# Altium PCB SuperCap-NEW-V2.0.PcbDoc (part 1 of 2)
Units mm, origin at the board's own origin, x right, y up, seen from the top; angles counter-clockwise.
Board outline 100.01 x 70.01 mm, 4 copper layers (Top Layer, POWER, GND, Bottom Layer), stack 0.603 mm thick; 124 components, 69 nets, 395 pads, 430 vias.
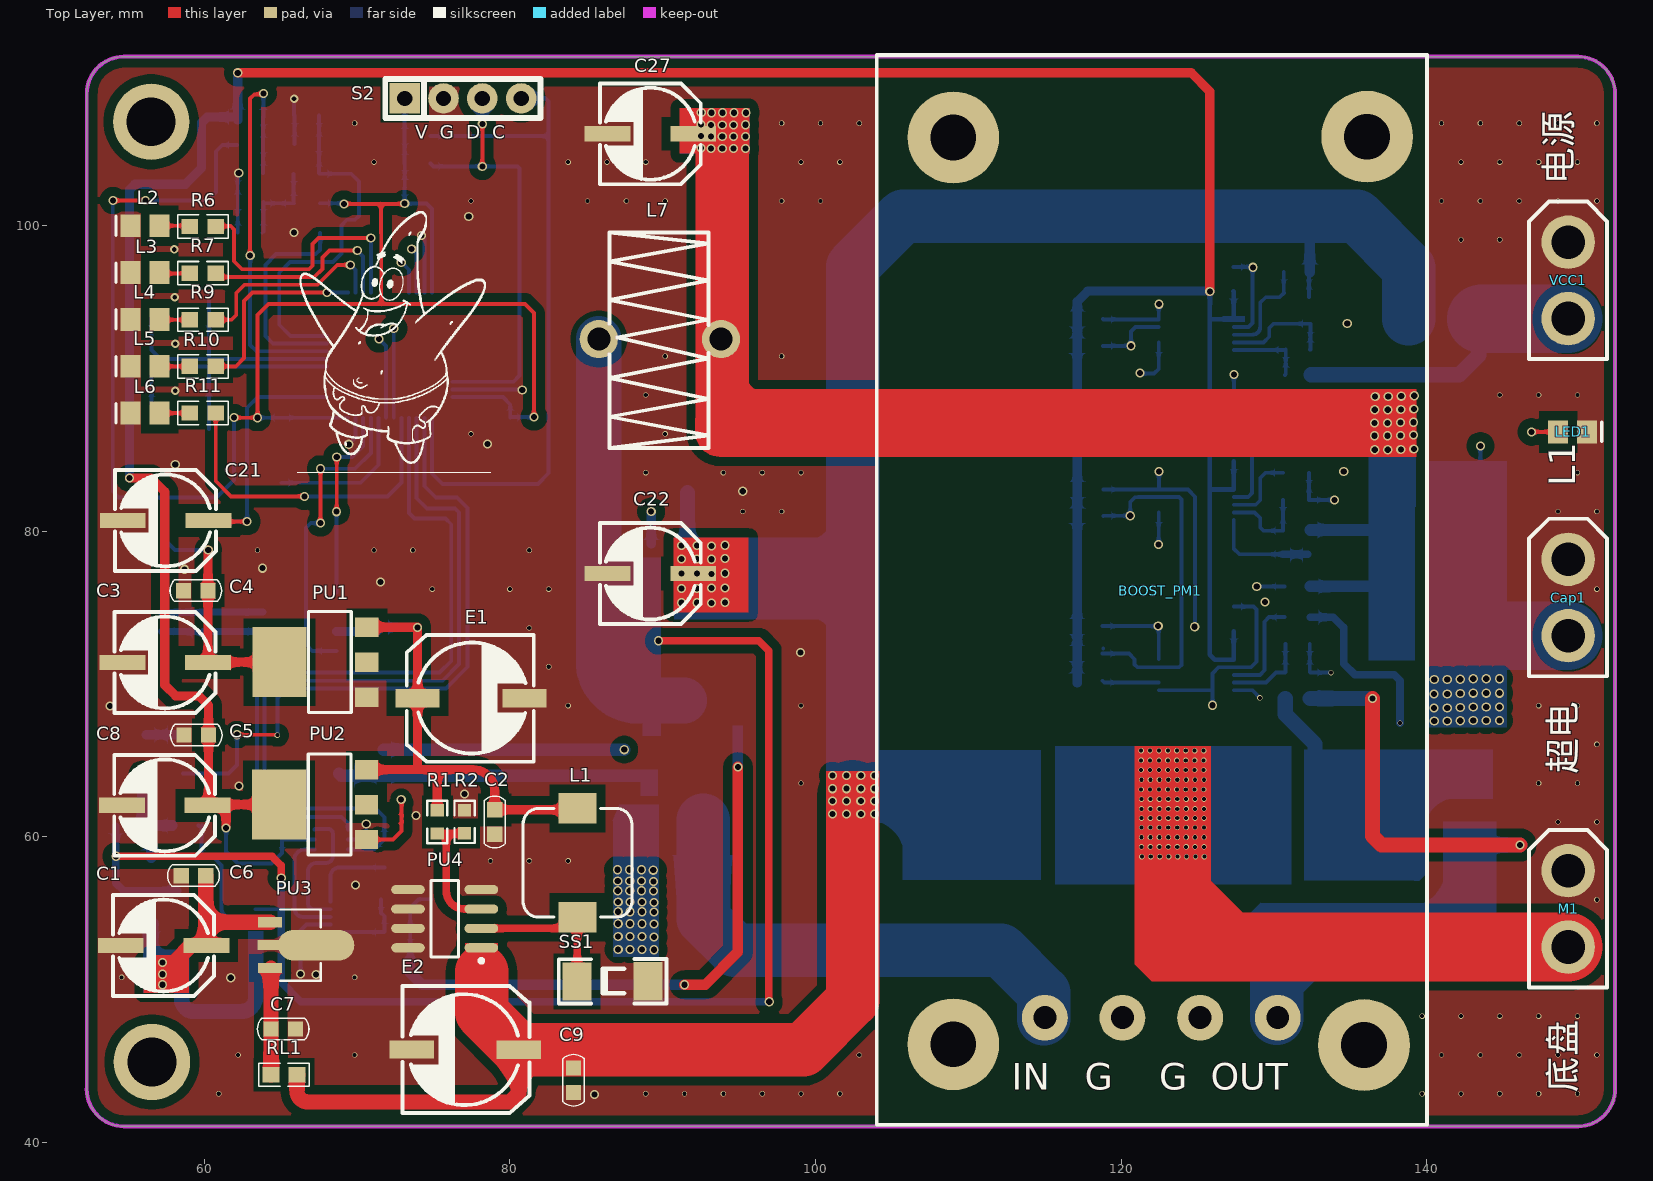
[diagram p0: Top Layer view]
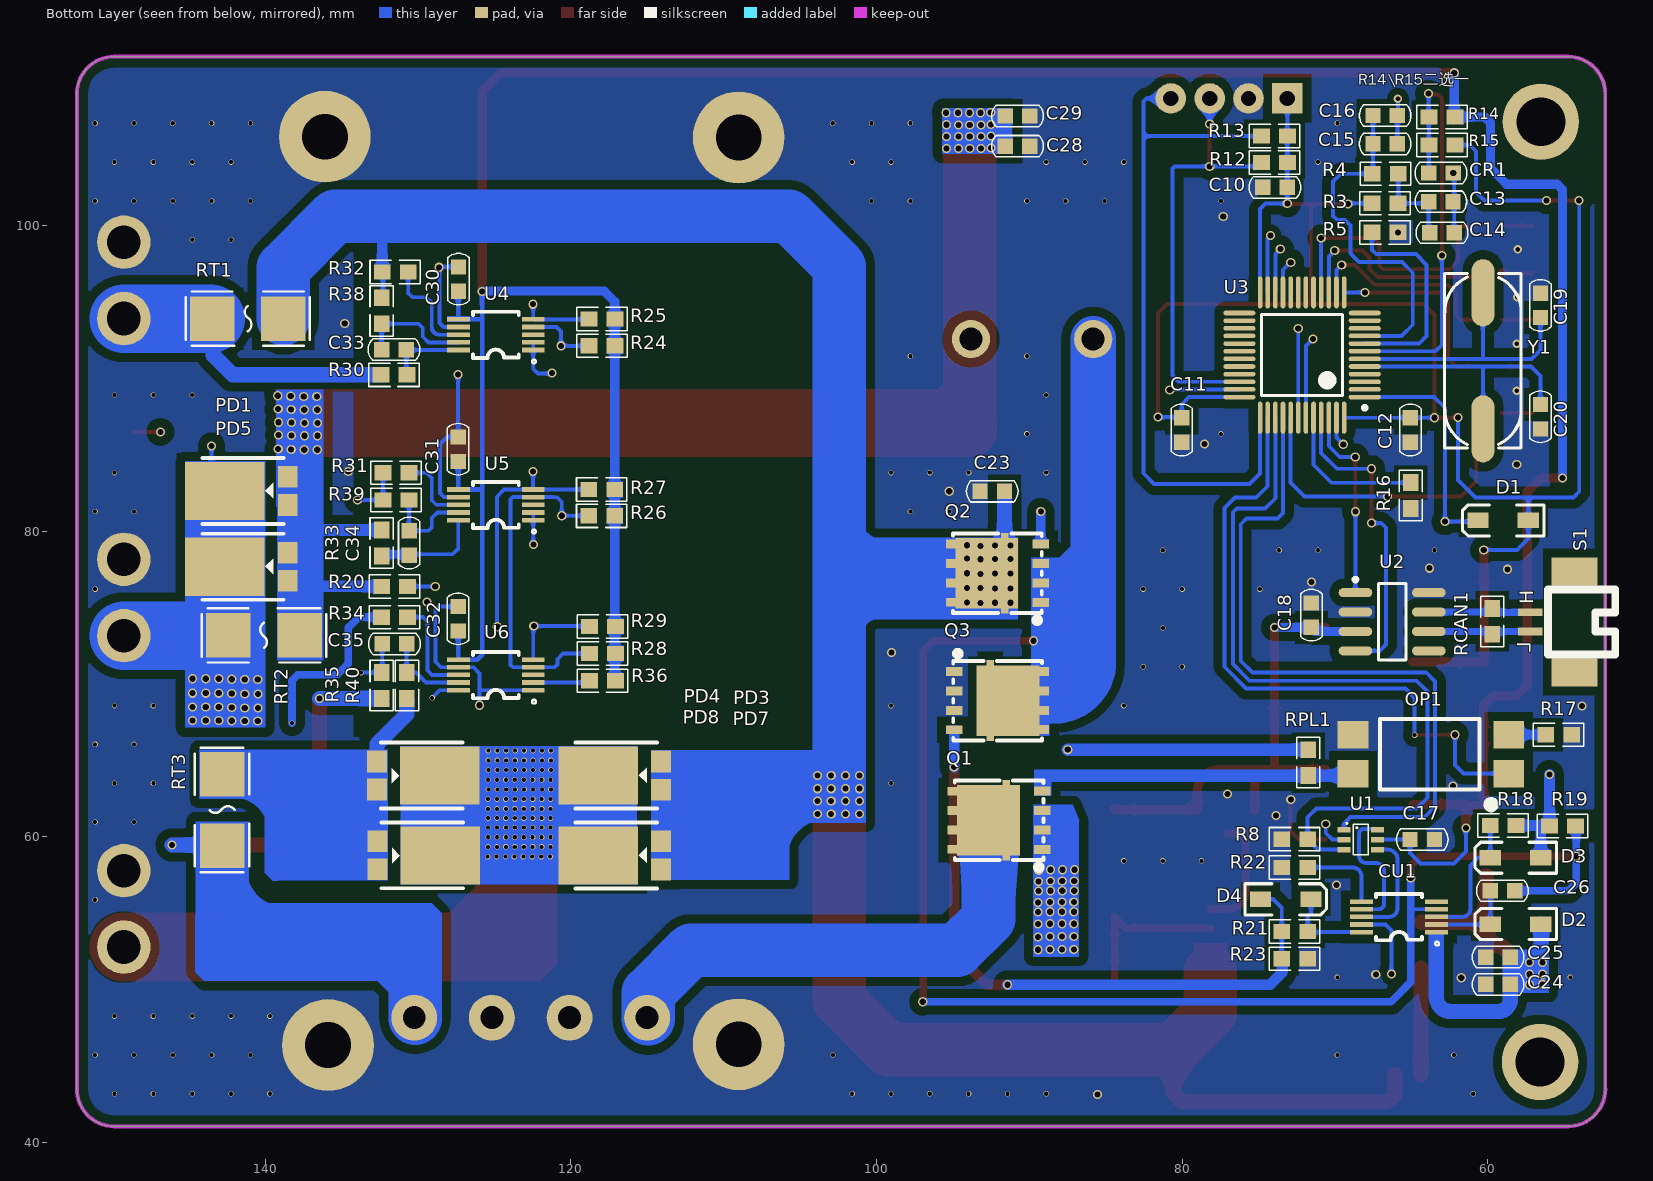
[diagram p1: Bottom Layer view, seen from below]
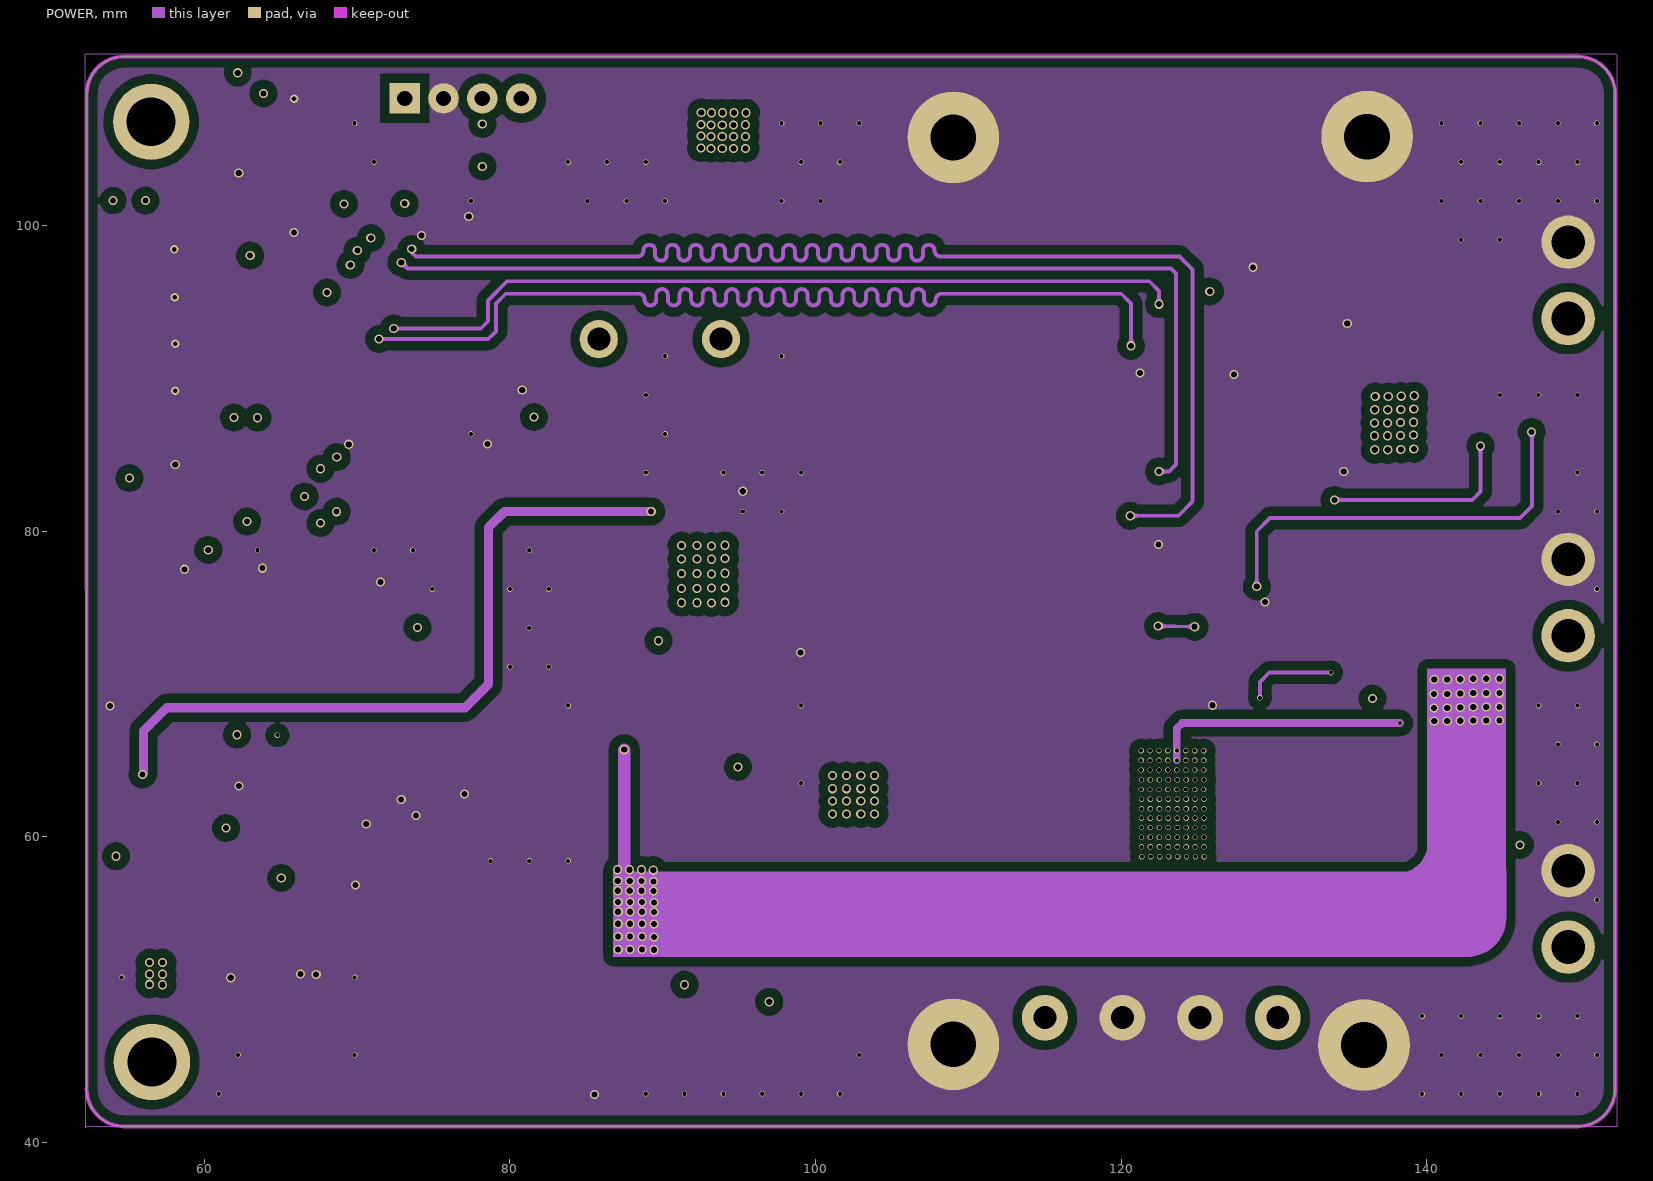
[diagram p2: POWER]
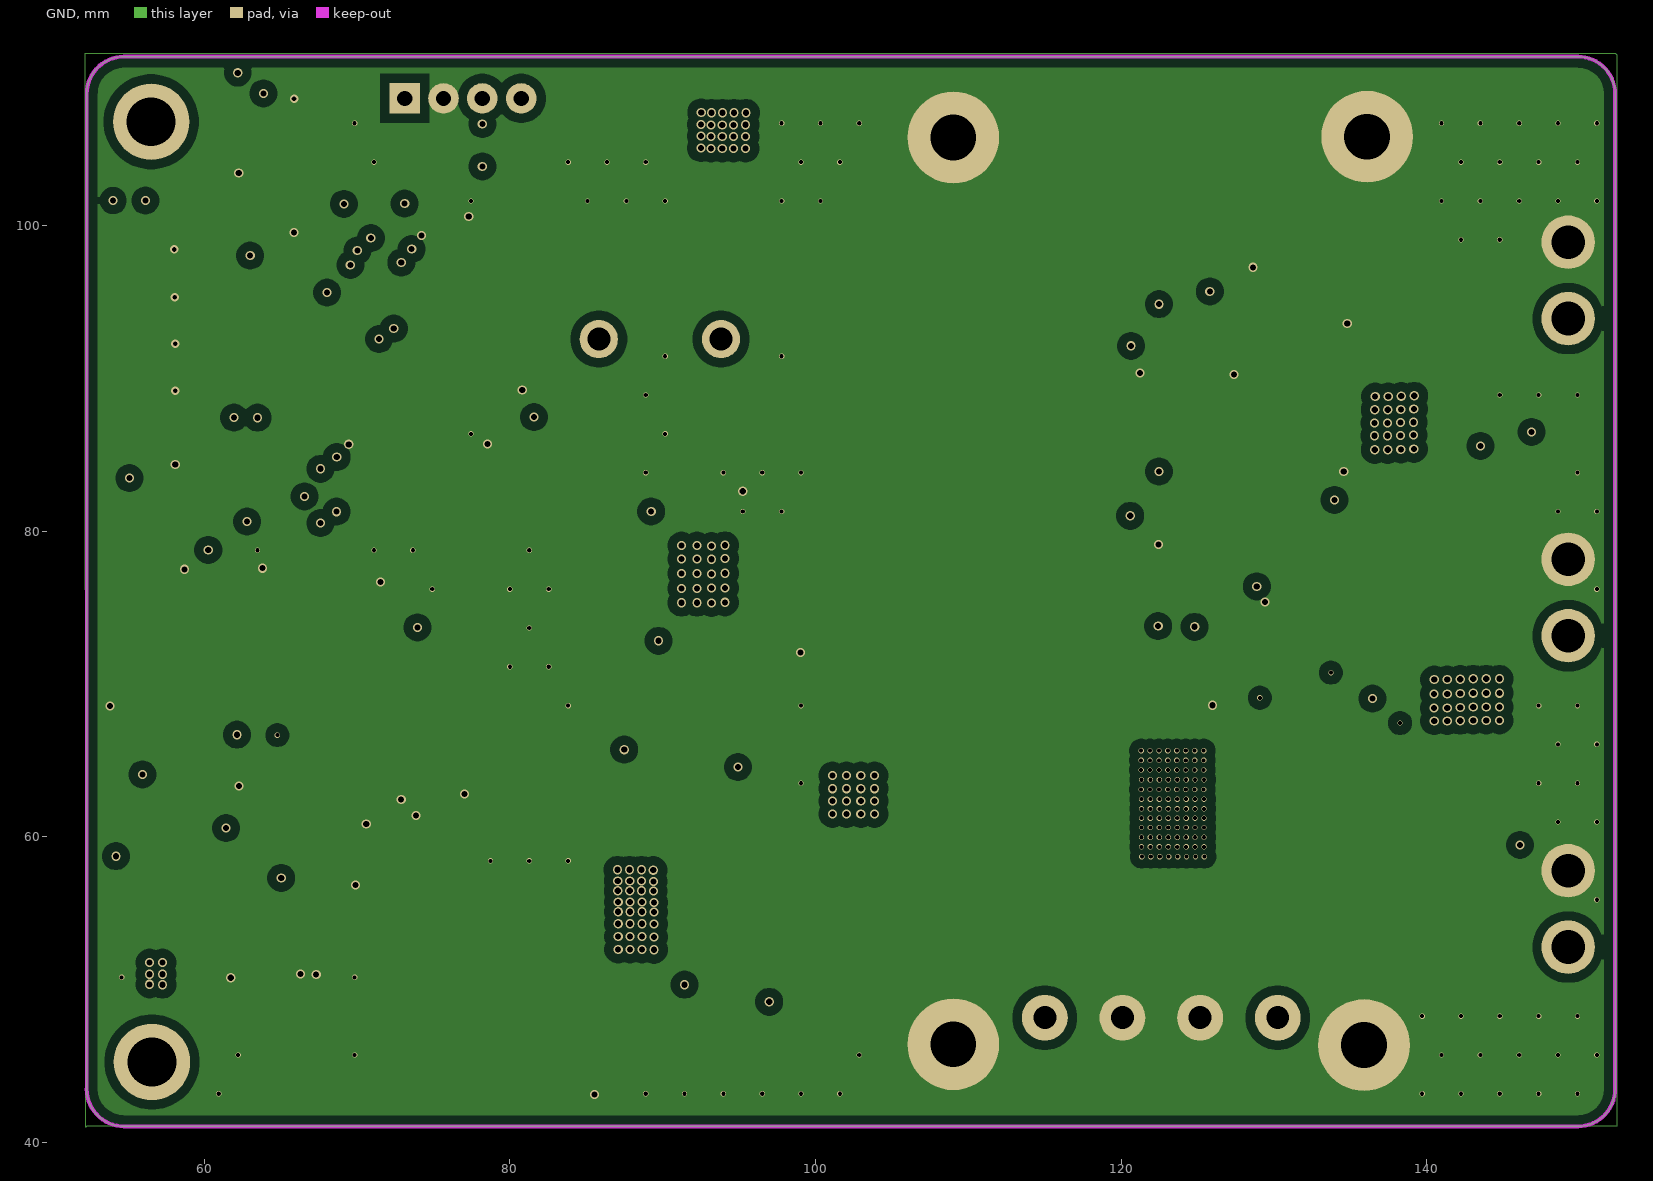
[diagram p3: GND]

## Layer stack, top to bottom
Top Solder: solder mask 0.0102, Solder Resist, Dk 3.5
Top Layer: signal copper 0.0356
Dielectric 2: prepreg 0.0711, PP-006, Dk 4.1
POWER: signal copper 0.035
Dielectric 1: dielectric 0.32, FR-4, Dk 4.8
GND: signal copper 0.035
Dielectric 3: prepreg 0.0711, PP-006, Dk 4.1
Bottom Layer: signal copper 0.0356
Bottom Solder: solder mask 0.0102, Solder Resist, Dk 3.5

## Board outline
52.32,43.483 ccw(c54.771,43.496) 54.784,41.045 54.764,41.045 149.884,41.045 149.886,41.041 ccw(c149.873,43.492) 152.324,43.505 152.324,43.485 152.324,108.636 152.328,108.609 ccw(c149.877,108.596) 149.864,111.047 149.912,111.047 54.812,111.047 54.762,111.049 ccw(c54.775,108.598) 52.324,108.585 52.324,108.56

## Design rules (kind name [scope] priority, off if disabled: settings)
Clearance [All] p1: gap=0.2 ignorepadtopadclearanceinfootprint=FALSE
PolygonConnect [All] p1: connectstyle=Direct reliefconductorwidth=0.254 reliefentries=4 polygonreliefangle="90 Angle" airgapwidth=0.254
RoutingVias [All] p1: holewidth=0.711 width=1.27 viastyle="Through Hole" minholewidth=0.711 minwidth=1.27 maxholewidth=0.711 maxwidth=1.27
SolderMaskExpansion [All] p1: expansion=0.102 istentingtop=FALSE
Width [All] p1: maxlimit=999 minlimit=0.254 preferedwidth=0.254 minimp=50.000000 maximp=50.000000 favimp=50.000000
30 further rules are at their usual default settings.

## Components (designator, comment, footprint, x,y, rotation, side; value= is the part's Value field where it differs from the comment)
BOOST_PM1 "Boost" Boost_Block 109.011,46.158 r0 top
C1 "47uF/50V" CAP-SMD_BD6.3-L6.6-W6.6-FD 57.353,52.883 r180 top value=100uF
C2 "100nF" 0603C 79.019,60.96 r270 top
C3 "10V/470uF" CAP-SMD_BD6.3-L6.6-W6.6-FD 57.455,71.399 r180 top value=100uF
C4 "100nF" 0603C 59.461,76.098 r0 top
C5 "100nF" 0603C 59.487,66.65 r0 top
C6 "100nF" 0603C 59.309,57.455 r0 top
C7 "104" 0603C 65.176,47.422 r0 top
C8 "Cap Pol1" CAP-SMD_BD6.3-L6.6-W6.6-FD 57.429,62.052 r180 top value=470uF/10V
C9 "104" 0603C 84.176,44.069 r270 top
C10 "100nF" 0603C 73.939,102.489 r180 bottom
C11 "100nF" 0603C 80.035,86.614 r90 bottom
C12 "100nF" 0603C 65.075,86.614 r90 bottom
C13 "1uF" 0603C 63.081,101.549 r180 bottom value=100nF
C14 "100nF" 0603C 63.005,99.517 r0 bottom
C15 "1uF" 0603C 66.726,105.334 r0 bottom value=100nF
C16 "100nF" 0603C 66.726,107.188 r0 bottom
C17 "Cap" 0603C 64.3,59.817 r180 bottom value=100pF
C18 "104" 0603C 71.552,74.498 r90 bottom
C19 "20P" 0603C 56.566,94.767 r90 bottom
C20 "20P" 0603C 56.566,87.478 r270 bottom
C21 "470uF/10V" CAP-SMD_BD6.3-L6.6-W6.6-FD 57.48,80.696 r180 top value=10uF
C22 "47uF/50V" CAP-SMD_BD6.3-L6.6-W6.6-FD 89.205,77.216 r180 top value=100uF
C23 "50V 10uf" 0603C 92.431,82.601 r180 bottom value=100nF
C24 "25V 10uf" 0603C 59.334,50.343 r180 bottom value=100nF
C25 "100nF" 0603C 59.334,52.121 r180 bottom
C26 "100nF" 0603C 59.055,56.464 r0 bottom
C27 "47uF/50V" CAP-SMD_BD6.3-L6.6-W6.6-FD 89.205,105.994 r180 top value=100uF
C28 "50V 10uf" 0603C 90.78,105.181 r0 bottom value=100nF
C29 "50V 10uf" 0603C 90.78,107.163 r0 bottom value=100nF
C30 "100nF" 0603C 127.356,96.482 r270 bottom
C31 "100nF" 0603C 127.381,85.357 r270 bottom
C32 "100nF" 0603C 127.381,74.257 r270 bottom
C33 "100nF" 0603C 131.572,91.872 r180 bottom
C34 "100nF" 0603C 130.581,79.223 r270 bottom
C35 "100nF" 0603C 131.547,72.619 r0 bottom
Cap1 "XT30" XT30 149.25,73.152 r90 top
CR1 "100nF" 0603C 63.068,103.429 r0 bottom
CU1 "LM5106" MSOP_10 63.411,53.738 r90 bottom
D1 "14007" SOD123 57.353,80.696 r0 bottom
D2 "MBR0540TIG" SOD123 56.54,54.28 r0 bottom
D3 "IN4148WS" SOD123 56.54,58.623 r0 bottom
D4 "IN4148WS" SOD123 74.879,55.905 r180 bottom
E1 "Cap Pol1" CAP-SMD_BD8.0-L8.3-W8.3-FD 77.47,69.063 r0 top value=470uF/16V
E2 "Cap Pol1" CAP-SMD_BD8.0-L8.3-W8.3-FD 77.089,46.076 r180 top
L1 "Inductor" "L 6*6" 84.43,54.737 r90 top value=10mH
L2 "红" LED_0805 57.094,99.974 r180 top
L3 "橙" LED_0805 57.094,96.911 r180 top
L4 "绿" LED_0805 57.094,93.847 r180 top
L5 "蓝" LED_0805 57.094,90.783 r180 top
L6 "白" LED_0805 57.094,87.719 r180 top
L7 "68UH" IND-TH_L14.0-W6.5-P8.00-D0.6 85.828,92.558 r0 top
LED1 "绿色" LED_0805 148.595,86.487 r0 top
M1 "XT30" XT30 149.25,52.782 r90 top
OP1 "SuperCap_OUT" SOP-4_L6.5-W4.6-P2.54-LS10.2-TL 63.729,65.405 r0 bottom
PD1 "SB20100" TO-277_3P-L5.4-W4.0-LS6.5-TR 140.583,82.625 r180 bottom
PD3 "SB20100" TO-277_3P-L5.4-W4.0-LS6.5-TR 116.154,64 r180 bottom
PD4 "SB20100" TO-277_3P-L5.4-W4.0-LS6.5-TR 130.628,64.008 r0 bottom
PD5 "SB20100" TO-277_3P-L5.4-W4.0-LS6.5-TR 140.583,77.666 r180 bottom
PD7 "SB20100" TO-277_3P-L5.4-W4.0-LS6.5-TR 116.154,58.776 r180 bottom
PD8 "SB20100" TO-277_3P-L5.4-W4.0-LS6.5-TR 130.603,58.784 r0 bottom
PU1 "AMS1117-3.3" SOT-223 67.793,71.425 r180 top
PU2 "AMS1117-3.3" SOT-223 67.767,62.103 r180 top
PU3 "78L05" SOT-89-3_L4.5-W2.5-P1.50-LS4.2-BR 65.684,52.908 r180 top
PU4 "XL1509-ADJ/5V0" "SOP8 N" 75.743,54.635 r180 top
Q1 "HYG210P06LQ1C2" MOS_PQFN 89.187,59.172 r90 bottom
Q2 "BSC109N10NS3" PDFN-8_L4.9-W5.8-P1.27-LS6.1-BL_2 89.296,75.336 r90 bottom
Q3 "BSC109N10NS3" PDFN-8_L4.9-W5.8-P1.27-LS6.1-BL_2 94.887,70.81 r270 bottom
R1 "Res1" R0603 75.345,60.27 r90 top value=3.3K
R2 "Res1" R0603 76.962,61.671 r270 top value=1K
R3 "0R" 0603-1 66.739,101.448 r180 bottom value=1K
R4 "47R" 0603-1 66.714,103.378 r0 bottom value=1K
R5 "0R" 0603-1 66.739,99.543 r180 bottom value=1K
R6 "Res2" 0603-1 59.919,99.924 r180 top value=1K
R7 "Res2" 0603-1 59.919,96.874 r0 top value=1K
R8 "Res2" 0603-1 72.644,59.842 r0 bottom value=10K
R9 "Res2" 0603-1 59.919,93.824 r0 top value=1K
R10 "Res2" 0603-1 59.919,90.775 r0 top value=1K
R11 "Res2" 0603-1 59.919,87.725 r0 top value=1K
R12 "10K" 0603-1 73.965,104.115 r0 bottom
R13 "10K" 0603-1 73.965,105.842 r0 bottom
R14 "10K" 0603-1 63.004,107.086 r0 bottom
R15 "10K" 0603-1 63.004,105.258 r0 bottom
R16 "10K" 0603-1 65.049,82.321 r270 bottom
R17 "1K" 0603-1 55.372,66.675 r180 bottom
R18 "10Ω" 0603-1 59.004,60.731 r180 bottom value=1K
R19 "10K" 0603-1 55.118,60.706 r180 bottom value=1K
R20 "10K" 0603-1 131.533,76.378 r0 bottom value=1K
R21 "10Ω" 0603-1 72.645,53.797 r0 bottom value=1K
R22 "47K" 0603-1 72.645,57.988 r0 bottom value=1K
R23 "10K" 0603-1 72.645,52.019 r180 bottom value=1K
R24 "4.7K" 0603-1 117.959,92.119 r0 bottom value=1K
R25 "4.7K" 0603-1 117.959,93.872 r0 bottom value=1K
R26 "4.7K" 0603-1 117.984,80.994 r0 bottom value=1K
R27 "4.7K" 0603-1 117.984,82.721 r0 bottom value=1K
R28 "4.7K" 0603-1 117.933,71.983 r0 bottom value=1K
R29 "4.7K" 0603-1 117.933,73.755 r0 bottom value=1K
R30 "5.1Ω" 0603-1 131.572,90.221 r0 bottom value=1K
R31 "Res2" 0603-1 131.446,83.813 r180 bottom value=10R
R32 "Res2" 0603-1 131.496,96.952 r180 bottom value=10R
R33 "5.1Ω" 0603-1 132.385,79.223 r90 bottom value=1K
R34 "Res2" 0603-1 131.547,74.364 r180 bottom value=10R
R35 "5.1Ω" 0603-1 132.385,69.901 r270 bottom value=1K
R36 "Res2" 0603-1 117.932,70.206 r180 bottom value=4.7K
R38 "5.1Ω" 0603-1 132.385,94.412 r90 bottom value=1K
R39 "5.1Ω" 0603-1 131.446,82.035 r0 bottom value=1K
R40 "5.1Ω" 0603-1 130.734,69.901 r270 bottom value=1K
RCAN1 "Res2" 0603-1 59.715,74.092 r270 bottom value=120R
RL1 "47R" 0603-1 65.227,44.425 r180 top value=1K
RPL1 "1K" 0603-1 71.755,64.846 r270 bottom
RT1 "2512 5mΩ 2W" "FUSE-SMD_L6.1-W2.7 - duplicate" 141.148,93.897 r180 bottom value=1K
RT2 "2512 5mΩ 2W" "FUSE-SMD_L6.1-W2.7 - duplicate" 140.081,73.177 r0 bottom value=1K
RT3 "2512 5mΩ 2W" "FUSE-SMD_L6.1-W2.7 - duplicate" 142.824,61.747 r90 bottom value=1K
S1 "CAN通信" 1.25_2Pin 57.226,74.676 r270 bottom
S2 "程序下载" S-4 73.127,108.306 r90 top
SS1 "D Schottky" 贴片M7 86.436,50.444 r270 top
U1 "SN74LVC2G17" SC-70-6_L2.0-W1.3-P0.65-LS2.1-BL 68.326,59.842 r270 bottom
U2 "TJA1050" "SOP8 N" 66.269,74.066 r180 bottom
U3 "STM32F103C8T6" LQFP-48_M 72.161,91.516 r0 bottom
U4 "INA226" MSOP_10 122.504,91.831 r90 bottom
U5 "INA226" MSOP_10 122.504,80.702 r90 bottom
U6 "INA226" MSOP_10 122.504,69.572 r90 bottom
VCC1 "XT30" XT30 149.25,93.904 r90 top
Y1 "8MHz" X-SM49 60.325,91.135 r90 bottom

## Footprints (in the part's own frame and the unit in brackets; to place one, negate y for a bottom-side part, rotate by r counter-clockwise, add the part's x,y. Pads: shape width x height; smd on the part's side, far side on the other; paste and mask are expansions set on the pad)
1.25_2Pin [mm]
  rect 2.1x3 smd: 0(-2.55,2.9) 0(3.8,2.9)
  rect 0.5x1.6 smd: 1(0,0) 2(1.25,0)
  silkscreen extent -1.5,1.15 2.75,5.55
0603-1 [mm]
  rect 1.1x1 smd: 1(-0.85,0) 2(0.85,0)
  silkscreen extent -1.65,-0.76 1.65,0.76, body extent -1.14,-0.38 1.14,0.38, height 1
0603C [mm]
  rect 1x1 smd: 1(0.8,0) 2(-0.8,0)
  silkscreen extent -1.69,-0.7 1.69,0.7
Boost_Block [mm]
  round 3 hole 1.5: 1(6,2) 2(11.08,2) 3(16.16,2) 4(21.24,2)
  round 6 hole 3: 5(0.012,0.259) 6(26.885,0.208) 7(27.088,59.644) 8(0.012,59.594)
  silkscreen extent -5,-5 31,65
CAP-SMD_BD6.3-L6.6-W6.6-FD [mm]
  rect 3x1 smd: 1(-2.8,0) 2(2.8,0)
  silkscreen extent -3.3,-3.3 3.3,3.3
CAP-SMD_BD8.0-L8.3-W8.3-FD [mm]
  rect 2.901x1.199 smd: 1(-3.5,0.005) 2(3.5,-0.005)
  silkscreen extent -4.21,-4.16 4.1,4.15
"FUSE-SMD_L6.1-W2.7 - duplicate" [mm]
  rect 2.91x2.905 smd: 1(-2.33,0) 2(2.33,0)
  silkscreen extent -4.06,-1.78 4.06,1.78
IND-TH_L14.0-W6.5-P8.00-D0.6 [mm]
  round 2.5 hole 1.5: 1(0,0) 2(8,0)
  silkscreen extent 0.7,-7.11 7.17,6.98
"L 6*6" [mm]
  rect 2x2.5 smd: 1(0,0) 2(7.112,0)
  silkscreen extent 0,-3.56 7.11,3.56, body extent 0,-3.56 7.11,3.56, height 4
LED_0805 [mm]
  rect 1.3x1.5 smd: 1(0,0) 2(1.9,0)
  silkscreen extent 2.86,-0.63 2.86,0.64
LQFP-48_M [mm]
  oval 2.1x0.3 smd: 1(-4.1,2.75) 2(-4.1,2.25) 3(-4.1,1.75) 4(-4.1,1.25) 5(-4.1,0.75) 6(-4.1,0.25) 7(-4.1,-0.25) 8(-4.1,-0.75) 9(-4.1,-1.25) 10(-4.1,-1.75) 11(-4.1,-2.25) 12(-4.1,-2.75) 25(4.1,-2.75) 26(4.1,-2.25) 27(4.1,-1.75) 28(4.1,-1.25) 29(4.1,-0.75) 30(4.1,-0.25) 31(4.1,0.25) 32(4.1,0.75) 33(4.1,1.25) 34(4.1,1.75) 35(4.1,2.25) 36(4.1,2.75)
  oval 0.3x2.1 smd: 13(-2.75,-4.1) 14(-2.25,-4.1) 15(-1.75,-4.1) 16(-1.25,-4.1) 17(-0.75,-4.1) 18(-0.25,-4.1) 19(0.25,-4.1) 20(0.75,-4.1) 21(1.25,-4.1) 22(1.75,-4.1) 23(2.25,-4.1) 24(2.75,-4.1) 37(2.75,4.1) 38(2.25,4.1) 39(1.75,4.1) 40(1.25,4.1) 41(0.75,4.1) 42(0.25,4.1) 43(-0.25,4.1) 44(-0.75,4.1) 45(-1.25,4.1) 46(-1.75,4.1) 47(-2.25,4.1) 48(-2.75,4.1)
  silkscreen extent -4.22,-2.65 2.65,3.57, body extent -3.5,-3.5 3.5,3.5, height 1.6
MOS_PQFN [mm]
  rect 0.58x1.079 smd: 1(3.81,-0.041) 3(0,-0.041) 3(1.27,-0.041) 3(2.54,-0.041)
  rect 0.95x0.5 smd: 2(-0.264,2.329) 2(4.074,2.329)
  rect 0.58x1.08 smd: 2(0.005,5.629) 2(1.275,5.629) 2(2.545,5.629) 2(3.805,5.629)
  rect 4.6x4.1 smd: 2(1.905,3.489)
  silkscreen extent -1.29,-0.1 4.5,5.7
MSOP_10 [mil]
  rect 12x59.06 smd: 1(0.63,-1.5) 2(20.32,-1.5) 3(40,-1.5) 4(59.69,-1.5) 5(79.37,-1.5) 6(79.37,191.5) 7(59.69,191.5) 8(40,191.5) 9(20.32,191.5) 10(0.63,191.5)
  silkscreen extent -34,-8 99,154
PDFN-8_L4.9-W5.8-P1.27-LS6.1-BL_2 [mm]
  rect 0.58x1.079 smd: 1(3.81,-0.041) 3(0,-0.041) 3(1.27,-0.041) 3(2.54,-0.041)
  rect 0.95x0.5 smd: 2(-0.264,2.329) 2(4.074,2.329)
  rect 0.58x1.08 smd: 2(0.005,5.629) 2(1.275,5.629) 2(2.545,5.629) 2(3.805,5.629)
  rect 4.6x4.1 smd: 2(1.905,3.489)
  silkscreen extent -1.29,-0.1 4.5,5.7
R0603 [mm]
  rect 0.806x0.864 smd: 1(-0.055,0.085) 2(1.452,0.085)
  silkscreen extent -0.69,-0.58 2.08,0.75
S-4 [mm]
  rect 2x2 hole 1: 1(0,0)
  round 2 hole 1: 2(0,-2.54) 3(0,-5.08) 4(0,-7.62)
  silkscreen extent -1.27,-8.89 1.27,1.27
SC-70-6_L2.0-W1.3-P0.65-LS2.1-BL [mm]
  rect 0.35x0.85 smd: 1(-0.615,-1.095) 2(0.035,-1.095) 3(0.685,-1.095) 4(0.685,1.105) 5(0.035,1.105) 6(-0.615,1.105)
  silkscreen extent -1.09,-0.96 1.04,0.5
SOD123 [mil]
  rect 55x40 smd: 1(0,0) 2(130,0)
  silkscreen extent -40,-40 170,40
"SOP8 N" [mm]
  oval 2.2x0.6 smd: 1(-2.4,1.905) 2(-2.4,0.635) 3(-2.4,-0.635) 4(-2.4,-1.905) 5(2.4,-1.905) 6(2.4,-0.635) 7(2.4,0.635) 8(2.4,1.905)
  silkscreen extent -2.53,-2.5 0.9,2.88, body extent -1.95,-2.45 1.95,2.45, height 1.75
SOP-4_L6.5-W4.6-P2.54-LS10.2-TL [mm]
  rect 2x1.8 smd: 1(-5.1,1.27) 2(-5.1,-1.27) 3(5.1,-1.27) 4(5.1,1.27)
  silkscreen extent -4.42,-2.29 3.32,3.79
SOT-89-3_L4.5-W2.5-P1.50-LS4.2-BR [mm]
  rect 1.575x0.672 smd: 1(1.356,-1.5) 2(1.397,0) 3(1.356,1.5)
  oval 5x2 smd: 2(-1.651,0)
  silkscreen extent -1.95,-2.33 0.7,2.33
SOT-223 [mil]
  rect 60x50 smd: 1(-112.5,90) 3(-112.5,-90) ""(-112.5,0)
  rect 140x180 smd: 2(112.5,0)
  silkscreen extent -73,-130 38,130
TO-277_3P-L5.4-W4.0-LS6.5-TR [mm]
  rect 1.29x1.422 smd: 1(2.054,-0.92) 1(2.054,0.92)
  rect 5.2x3.8 smd: 2(-2.054,0)
  silkscreen extent -3.54,-2.16 1.8,2.16
X-SM49 [mm]
  oval 4.4x1.5 smd: 1(4.45,0.004) 2(-4.45,-0.004)
  silkscreen extent -5.7,-2.5 5.72,2.5
XT30 [mm]
  round 3.5 hole 2.2: 1(0,0) 2(5,0)
  silkscreen extent -2.65,-2.55 7.65,2.55
贴片M7 [mm]
  rect 2.5x1.9 smd: 1(-0.1,2.625) 2(-0.091,-2.025)
  silkscreen extent -1.55,-3.22 1.36,3.82

## Part data
C1 C3 C22 C27: library part "Cap Pol", "极性电解电容", LatestRevisionDate=17-Jul-2002, LatestRevisionNote="Re-released for DXP Platform.", PackageReference=RB7.6-15, Published=8-Jun-2000, Publisher="Altium Limited", Vol=16V
C2 C7 C9: library part C
C4 C5 C6 C10 C11 C12 C13 C14 C15 C16 C23 C24 C25 C26 C28 C29 C30 C31 C32 C33 C34 C35: library part Cap, "无极性电容", LatestRevisionDate=17-Jul-2002, LatestRevisionNote="Re-released for DXP Platform.", PackageReference=RAD-0.3, Published=8-Jun-2000, Publisher="Altium Limited"
C8 E1 E2: "Polarized Capacitor (Radial)", LatestRevisionDate=17-Jul-2002, LatestRevisionNote="Re-released for DXP Platform.", PackageDescription="Polarized Capacitor (Radial); 2 Leads", PackageReference=RB7.6-15, Published=8-Jun-2000, Publisher="Altium Limited"
  E2: H781F=47uF/50V
C17: "Capacitor", LatestRevisionDate=17-Jul-2002, LatestRevisionNote="Re-released for DXP Platform.", PackageDescription="Radial Cap, Thru-Hole; 2 Leads; 0.3 in Pin Spacing", PackageReference=RAD-0.3, Published=8-Jun-2000, Publisher="Altium Limited"
C18 C19 C20 CR1: library part CAP-1
C21: library part "Cap Pol1", "Polarized Capacitor (Radial)", Published=8-Jun-2000, Publisher="Altium Limited", Revision="July-2002: Re-released for DXP Platform."
Cap1 M1 VCC1: library part JP-2
CU1 U4 U5 U6: library part Component_1
D1 D4 PD1 PD3 PD4 PD5 PD7 PD8: library part "Diode 1N914", "High Conductance Fast Diode", Code_JEDEC=DO-204-AH, ComponentLink1Description="Manufacturer Link", ComponentLink1URL=http://www.fairchildsemi.com/, ComponentLink2Description=Datasheet, ComponentLink2URL=http://www.fairchildsemi.com/ds/1N%2F1N4448.pdf, DatasheetVersion=1997, LatestRevisionDate=17-Jul-2002, LatestRevisionNote="Re-released for DXP Platform.", PackageDescription="Diode, Axial; Body 3.8 x 1.9 mm (LxDia. max), Lead Dia. 0.53 mm (max)", PackageReference=DO-35, Published=8-Jun-2000, Publisher="Altium Limited"
D2 D3: library part D-1
L2 L3 L4 L5 L6 LED1: library part LED0, "发光二极管", LatestRevisionDate=08-Jul-2005, LatestRevisionNote="Mech Layer 1 removed.", PackageReference=LED-0, Published=8-Jun-2000, Publisher="Altium Limited"
L7: library part Inductance
OP1: library part Optoisolator1, "4-Pin Phototransistor Optocoupler", DatasheetVersion=Nov-2003, LatestRevisionDate=04-Mar-2005, LatestRevisionNote="Sch pins 3 & 4 Swapped.", PackageReference=DIP-4, Published=24-Mar-1999, Publisher="Altium Limited"
PU1 PU2: library part LD1117
PU4: library part XL1509-ADJ
Q1: library part PMOS-2, "P-Channel Power MOSFET", ComponentLink1Description="Manufacturer Link", ComponentLink1URL=http://www.irf.com/, DatasheetVersion=PD-9.390D, LatestRevisionDate=17-Jul-2002, LatestRevisionNote="Re-released for DXP Platform.", Note="Pin 4 not drawn and electrically connected to Pin 2.", PackageDescription="TO, Thru-Hole, Vertical, Heatsink Mounted; 3 In-Line Leads; Pitch 2.54 mm", PackageReference=TO-220AB, PackageVersion=Feb-1997, Published=8-Jun-2000, Publisher="Altium Limited"
Q2 Q3: library part NMOS-2, "N-Channel Power MOSFET", ComponentLink1Description="Manufacturer Link", ComponentLink1URL=http://www.irf.com/, DatasheetVersion=PD-9.814, LatestRevisionDate=17-Jul-2002, LatestRevisionNote="Re-released for DXP Platform.", Note="Pin 2 is electrically connected to pin 4.", PackageDescription="TO, Thru-Hole, Vertical, Heatsink Mounted; 3 In-Line Leads; Pitch 2.54 mm", PackageReference=TO-220AB, PackageVersion=Feb-1997, Published=8-Jun-2000, Publisher="Altium Limited"
R1 R2 R6 R7 R8 R9 R10 R11 R31 R32 R34 R36 RCAN1: "Resistor", LatestRevisionDate=17-Jul-2002, LatestRevisionNote="Re-released for DXP Platform.", Published=8-Jun-2000, Publisher="Altium Limited"
  R1 R2: PackageDescription="Axial Device, Thru-Hole; 2 Leads; 0.3 in Pin Spacing", PackageReference=AXIAL-0.3
  R6 R7 R8 R9 R10 R11 R31 R32 R34 R36 RCAN1: PackageDescription="Axial Device, Thru-Hole; 2 Leads; 0.4 in Pin Spacing", PackageReference=AXIAL-0.4
R3 R4 R5 R17 R18 R19 R20 R21 R22 R23 R24 R25 R26 R27 R28 R29 R30 R33 R35 R38 R39 R40 RL1 RPL1 RT1 RT2 RT3: library part Res1, "贴片电阻", LatestRevisionDate=17-Jul-2002, LatestRevisionNote="Re-released for DXP Platform.", PackageReference=AXIAL-0.4, Published=8-Jun-2000, Publisher="Altium Limited"
R12 R13 R14 R15 R16: library part R
S1: library part S-2
S2: library part S-4
SS1: "Schottky Diode", Code_JEDEC=DO-214-AA, LatestRevisionDate=17-Jul-2002, LatestRevisionNote="Re-released for DXP Platform.", PackageDescription="DO-214-AA/SMB; 2 C-Bend Leads; Body 5.3 x 3.6 mm, inc. leads (LxW)", PackageReference=SMB, Published=8-Jun-2000, Publisher="Altium Limited"
U2: library part 24C02
Y1: library part XTAL, "Crystal Oscillator", LatestRevisionDate=17-Jul-2002, LatestRevisionNote="Re-released for DXP Platform.", Published=8-Jun-2000, Publisher="Altium Limited"
L1: Code_IEC=1005, Code_JEITA=0402, LatestRevisionDate=29-May-2009, LatestRevisionNote="IPC-7351 Footprint Added.", PackageDescription="Chip Inductor", PackageReference=0402-A, Published=8-Jun-2000, Publisher="Altium Limited"

## Free pads (board coordinates)
  round 5 hole 3.2: 4(56.54,106.782) 4(56.591,45.263)

## Via types
v1: diameter 0.6, hole 0.4, Top Layer to Bottom Layer, 223 vias
v2: diameter 0.35, hole 0.27, Top Layer to Bottom Layer, 202 vias
v3: diameter 0.559, hole 0.305, Top Layer to Bottom Layer, 5 vias

## Nets (pads, with @x,y where several pads share a name; then routed paths per layer and width w, separated by ;. In a path a pad name is that pad's centre, name@x,y a point inside that pad or via, vN(x,y) a via of type N, cw(c..) or ccw(c..) an arc to the next point about the centre after c; other vN are vias at no path point)
3.3V: C5.1 C8.1 C17.2 C30.1 C31.1 C32.1 PU2.2 R14.1 R24.1 R25.1 R26.1 R27.1 R28.1 R29.1 R36.2 U1.5 U4.6 U5.6 U6.6 | length 218.2
  Top Layer w0.6: v1(55.118,83.464) 56.54,83.464 57.429,82.575 57.429,69.926 58.141,69.215 59.665,69.215 60.287,68.593 C5.1@60.287,66.65 60.287,62.11 cw(c60.229,62.11) 60.286,62.103 cw(c60.229,62.11) C8.1@60.229,62.052 61.443,62.052 v1@61.443,60.655 ; C8.1@61.443,62.103 PU2.2@64.91,62.103 ; v1(62.205,109.982) 124.587,109.982 125.806,108.763 v1(125.806,95.682)
  Bottom Layer w0.254: v1(61.443,60.565) 61.443,59.03 62.23,58.242 64.414,58.242 65.1,58.928 C17.2@65.1,59.807 ; C17.2@65.1,59.817 C17.2@65.1,59.807 ; U1.5@67.221,59.807 C17.2@65.1,59.807
  Bottom Layer w0.3: v1(125.806,95.682) 125.806,93.904 ; C30.1@127.356,95.682 127.368,95.669 U4.6@127.368,93.847 125.863,93.847 125.806,93.904 ; C32.1@127.381,73.457 127.368,73.444 U6.6@127.368,71.588 126.126,71.588 125.806,71.907 125.806,82.677 ; C31.1@127.381,84.557 127.368,84.544 U5.6@127.368,82.718 125.847,82.718 ccw(c125.847,82.677) 125.806,82.677 ; 125.806,82.677 125.806,82.718 125.806,93.904
  Bottom Layer w0.6: v1(55.118,83.464) 55.118,102.341 55.469,102.692 58.776,102.692 59.842,103.759 59.842,106.735 60.194,107.086 R14.1@62.154,107.086 ; R14.1@62.205,106.886 v1(62.205,109.982) ; R36.2@117.134,70.053 117.134,71.907 117.134,73.679 R26.1@117.134,80.994 R27.1@117.134,82.721 117.134,92.119 117.134,93.872 117.134,95.015 117.817,95.698 125.79,95.698 v1(125.806,95.682)
3.3V_MCU: C3.1 C4.1 C10.1 C11.1 C12.1 D1.1 PU1.2 R3.1 R12.1 R13.1 R15.1 S2.1 U3.24 U3.36 U3.48 | length 133.4
  Top Layer w0.254: v1(54.051,101.625) v1(56.159,101.625) ; v1@61.963,87.414 v1(63.5,87.414) 63.5,94.132 64.211,94.844 71.592,94.844 ; v1(69.151,101.409) 71.577,101.409 ; v1(73.127,101.422) 73.114,101.409 71.577,101.409 ; v1(81.585,87.452) 81.585,94.259 81.001,94.844 71.592,94.844 ; 71.577,101.409 71.577,99.484 71.592,99.469 71.592,94.844
  Top Layer w0.6: v1(60.274,78.765) 60.261,78.753 C4.1@60.261,76.098 60.255,76.098 C3.1@60.255,71.399 cw(c60.28,71.399) 60.28,71.425 PU1.2@64.935,71.425
  Bottom Layer w0.254: v1(54.051,101.625) 54.026,101.6 54.026,82.575 54.407,82.194 57.353,82.194 ; v1(56.159,101.625) 60.223,101.625 60.782,102.184 60.782,104.851 61.189,105.258 R15.1@62.154,105.258 ; v1(60.274,78.765) 58.09,78.765 57.353,79.502 D1.1@57.353,80.696 57.353,82.194 ; v1(61.951,87.427) 61.951,83.337 60.808,82.194 57.353,82.194 ; v1(63.5,87.414) C12.1@65.075,87.414 65.077,87.416 U3.48@69.411,87.416 ; R3.1@67.589,101.448 69.113,101.448 v1(69.151,101.409) ; S2.1@73.127,108.306 73.127,104.04 73.128,104.038 C10.1@73.128,102.464 ; C10.1@73.128,102.413 C10.1@73.128,102.464 ; C10.1@73.154,102.489 C10.1@73.128,102.464 ; U3.24@74.911,95.616 74.911,101.06 74.549,101.422 v1(73.127,101.422) 73.127,102.462 C10.1@73.128,102.464 ; U3.36@76.261,88.766 79.56,88.766 80.035,88.29 C11.1@80.035,87.414 80.074,87.452 v1(81.585,87.452)
5V: C2.2 C18.2 E1.1 L1.2 PU1.3 PU2.3 R1.2 U2.3 | length 36.6
  Top Layer w0.6: PU2.3@70.625,64.389 73.99,64.389 ; PU1.3@70.65,73.711 73.97,73.711 E1.1@73.97,69.068 73.97,64.409 ccw(c73.99,64.409) 73.99,64.389 ; R1.2@75.26,61.722 75.26,64.389 ; L1.2@84.43,61.849 cw(c84.341,61.849) 84.341,61.76 C2.2@79.019,61.76 79.019,62.967 ccw(c77.597,62.967) 77.597,64.389 75.26,64.389 ; 73.99,64.389 75.26,64.389
  Bottom Layer w0.6: U2.3@68.669,73.431 71.285,73.431 C18.2@71.552,73.698 v1(73.965,73.698)
12V: C1.1 C6.1 C24.1 C25.1 CU1.1 D2.1 PU3.1 | length 28.3
  Top Layer w1: 58.53,50.343 58.53,52.259 59.153,52.883 C1.1@60.153,52.883 cw(c60.153,52.927) 60.109,52.927 60.109,54.408 ; C6.1@60.109,57.455 60.109,54.408 ; PU3.1@64.328,54.408 60.109,54.408
  Bottom Layer w1: D2.1@56.54,54.28 ccw(c56.54,54.254) 56.515,54.254 56.515,53.137 ccw(c57.531,53.137) 57.531,52.121 C25.1@58.534,52.121 C24.1@58.534,50.343 58.534,49.365 ccw(c59.334,49.365) 59.334,48.565 62.433,48.565 ccw(c62.433,49.505) 63.373,49.505 63.373,52.857
  other v1: 57.277,50.317 56.439,50.343 56.439,51.003 57.277,51.003 56.439,51.765 57.277,51.765
B_LED: R10.2 U3.13 | length 12.8
  Top Layer w0.254: R10.2@60.769,90.775 62.073,90.775 62.611,91.313 62.611,95.047 63.17,95.606 v1(68.047,95.606)
  Bottom Layer w0.254: v1@68.061,95.616 U3.13@69.411,95.616
Battery: R30.2 RT1.1 VCC1.1 | length 19.6
  Bottom Layer w1: R30.2@132.422,90.221 142.12,90.221 143.408,91.509 143.408,93.828 RT1.1@143.478,93.897
  Bottom Layer w4.5: RT1.1@143.579,93.897 VCC1.1@149.25,93.897
Battery_out: C9.2 C22.1 C23.1 E2.1 PD3.1 PD7.1 PU4.1 Q2.2 R32.1 R38.2 RL1.1 RT1.2 | length 147.2
  Top Layer w1: RL1.1@66.127,44.425 RL1.1@66.077,44.425 66.077,43.369 ccw(c66.799,43.369) 66.799,42.647 80.003,42.647 80.589,43.232 E2.1@80.589,46.071
  Top Layer w3.5: 78.156,51.181 78.156,48.504 E2.1@80.589,46.071 99.207,46.071 102.438,49.301 102.438,62.509
  Bottom Layer w0.254: 132.207,100.609 cw(c132.207,100.471) 132.346,100.471 ; R38.2@132.296,95.294 132.296,96.902 R32.1@132.346,96.952
  Bottom Layer w0.7: R32.1@132.346,96.952 132.346,100.471
  Bottom Layer w1: Q2.2@91.625,79.411 91.625,82.494 C23.1@91.63,82.499
  Bottom Layer w3: Q2.2@92.785,77.241 cw(c92.811,77.241) Q2.2@92.811,77.267
  Bottom Layer w3.5: 102.438,62.713 102.438,64.008 102.438,76.898 102.438,97.307 105.74,100.609 132.207,100.609 135.433,100.609 138.818,97.224 RT1.2@138.818,93.897
  other v1: 101.117,61.493 102.032,61.493 102.972,61.493 103.861,61.493 101.117,62.332 102.032,62.332 102.972,62.332 103.861,62.332 101.117,63.144 102.032,63.144 102.972,63.144 103.861,63.144 101.117,64.008 102.032,64.008 102.972,64.008 103.861,64.008 93.193,75.286 91.237,75.311 92.253,75.311 94.082,75.336 91.237,76.251 92.253,76.251 93.193,76.276 94.082,76.276 93.193,77.191 91.237,77.216 92.253,77.216 94.082,77.241 93.193,78.156 91.237,78.181 92.253,78.181 94.082,78.207 93.193,79.019 91.237,79.045 92.253,79.045 94.082,79.07
Boost_OUT: BOOST_PM1.4 R35.2 RT3.1 | length 46
  Top Layer w1: v1(136.449,69.037) 136.449,60.047 137.035,59.461 v1(146.101,59.461)
  Bottom Layer w1: R35.2@132.385,69.051 136.435,69.051 v1(136.449,69.037) ; RT3.1@142.824,59.417 142.868,59.461 v1(146.101,59.461)
  Bottom Layer w3.5: BOOST_PM1.4@130.2,48.133 130.2,50.571 132.283,52.654 140.774,52.654 142.824,54.704 142.824,57.633
"CAN H": RCAN1.1 S1.1 U2.7 | length 6.7
  Bottom Layer w0.254: RCAN1.1@59.602,74.676 59.715,74.789 RCAN1.1@59.803,74.701
  Bottom Layer w0.45: S1.1@57.226,74.676 RCAN1.1@59.602,74.676 ; RCAN1.1@59.803,74.701 U2.7@63.869,74.701
"CAN L": RCAN1.2 S1.2 U2.6 | length 6.8
  Bottom Layer w0.254: RCAN1.2@59.531,73.426 RCAN1.2@59.715,73.242 ; RCAN1.2@59.74,73.242 RCAN1.2@59.93,73.431
  Bottom Layer w0.45: S1.2@57.226,73.426 RCAN1.2@59.531,73.426 ; RCAN1.2@59.93,73.431 U2.6@63.869,73.431
"CAN RX": U2.4 U3.45 | length 20.5
  Top Layer w0.254: v1(67.615,80.518) 67.617,80.52 67.617,84.072 v1(67.619,84.074)
  Bottom Layer w0.254: v1(67.615,80.518) 66.98,80.518 66.675,80.213 66.675,72.568 67.081,72.161 U2.4@68.669,72.161 ; v1(67.619,84.074) 69.875,84.074 70.911,85.11 U3.45@70.911,87.416
"CAN TX": U2.1 U3.46 | length 12.8
  Top Layer w0.254: v1(68.669,81.268) 68.682,81.281 v1(68.682,84.836)
  Bottom Layer w0.254: U2.1@68.669,75.971 v1(68.669,81.268) ; v1(68.682,84.836) 69.698,84.836 70.411,85.55 U3.46@70.411,87.416
CAP_OUT: OP1.1 U3.38 | length 42.4
  Top Layer w0.254: v1(62.154,66.675) 64.77,66.675 v2(64.795,66.65)
  Bottom Layer w0.254: OP1.1@58.629,64.135 61.595,64.135 62.154,64.694 v1(62.154,66.675) ; v2(64.795,66.65) 64.795,69.088 65.405,69.698 75.819,69.698 77.241,71.12 77.241,81.509 76.556,82.194 75.159,82.194 74.419,82.934 74.419,82.942 ; 74.411,82.942 U3.38@74.411,87.416
ENABLE: CU1.7 U1.6 | length 8.9
  Bottom Layer w0.254: U1.6@67.221,60.457 cw(c67.267,60.457) 67.267,60.503 68.123,60.503 cw(c68.123,60.198) 68.428,60.198 68.428,58.725 cw(c67.996,58.725) 67.996,58.293 67.361,58.293 ccw(c67.361,57.734) 66.802,57.734 66.802,55.601 ccw(c67.148,55.601) 67.148,55.254 CU1.7@68.275,55.254
G_LED: R9.2 U3.14 | length 13.1
  Top Layer w0.254: R9.2@60.769,93.824 61.795,93.824 62.103,94.132 62.103,95.58 62.636,96.114 67.419,96.114 68.714,97.409 v1(69.571,97.409)
  Bottom Layer w0.254: v1(69.571,97.409) 69.911,97.068 U3.14@69.911,95.616
GND: BOOST_PM1.2 BOOST_PM1.3 BOOST_PM1.5 BOOST_PM1.6 BOOST_PM1.7 BOOST_PM1.8 C1.2 C2.1 C3.2 C4.2 C5.2 C6.2 C7.1 C8.2 C9.1 C10.2 C11.2 C12.2 C13.1 C14.2 C15.2 C16.2 C17.1 C18.1 C19.1 C20.1 C21.2 C22.2 C23.2 C24.2 C25.2 C27.2 C28.2 C29.2 C30.2 C31.2 C32.2 Cap1.2 CR1.2 CU1.9 E1.2 E2.2 L2.2 L3.2 L4.2 L5.2 L6.2 LED1.2 M1.2 OP1.3 PU1.1 PU2.1 PU3.2 PU4.4 PU4.5 PU4.6 PU4.7 PU4.8 Q3.3 R2.1 R5.2 R8.2 R16.2 R17.2 R22.2 R23.2 S2.2 SS1.1 U1.2 U2.2 U2.8 U3.23 U3.35 U3.47 U4.1 U4.2 U4.7 U5.1 U5.2 U5.7 U6.1 U6.7 VCC1.2 | length 64
  Top Layer w0.254: PU2.1@70.625,59.817 72.365,59.817 72.923,60.376 72.923,62.408 v1(72.898,62.433)
  Bottom Layer w0.254: C14.2@62.205,99.517 62.205,103.365 v1(62.268,103.429) ; v3(65.888,108.28) 65.888,107.226 C16.2@65.926,107.188 C15.2@65.926,105.334 ; v1(66.319,51.029) 66.319,53.873 66.7,54.254 CU1.9@68.275,54.254 ; U1.2@69.421,59.807 70.171,59.807 70.612,60.249 v1(70.612,60.833) ; v1(69.469,85.674) 69.911,86.117 U3.47@69.911,87.416 ; v1(74.219,99.339) 74.411,99.147 U3.23@74.411,95.616 ; U3.35@76.261,89.266 80.787,89.266 v1(80.823,89.23) ; v1(121.234,90.348) 121.285,90.297 122.149,90.297 122.466,90.615 U4.1@122.466,91.847 U4.2@122.466,92.348 ; v1(122.453,79.121) 122.466,79.134 U5.1@122.466,80.718 U5.2@122.466,81.218 ; U6.1@122.466,69.588 125.925,69.588 125.984,69.647 ; v1(125.984,68.605) 125.984,69.647 ; C30.2@127.356,97.282 v1@128.6,97.282 ; U5.7@127.368,82.218 128.302,82.218 128.31,82.226 128.318,82.226 128.575,82.483 128.575,85.7 128.118,86.157 C31.2@127.381,86.157 v1(127.381,90.246) ; U4.7@127.368,93.348 128.321,93.348 128.329,93.355 128.337,93.355 128.6,93.619 v1@128.6,97.257 ; C32.2@127.401,75.077 C32.2@127.381,75.057 128.677,75.057 128.854,74.879 128.854,71.45 128.492,71.088 U6.7@127.368,71.088 126.384,71.088 125.984,70.688 125.984,69.647
  other v1: 85.547,43.129 61.747,50.775 67.335,50.978 69.901,56.845 73.863,61.392 77.038,62.789 62.281,63.322 53.848,68.555 99.035,72.06 129.413,75.362 71.552,76.657 58.725,77.495 63.83,77.572 95.25,82.601 134.569,83.896 58.115,84.353 78.537,85.7 134.798,93.574 128.626,97.257 65.889,99.543 77.318,100.584
  other v2: 60.96,43.18 88.9,43.18 91.44,43.18 93.98,43.18 96.52,43.18 99.06,43.18 101.6,43.18 139.7,43.18 142.24,43.18 144.78,43.18 147.32,43.18 149.86,43.18 62.23,45.72 69.85,45.72 102.87,45.72 140.97,45.72 143.51,45.72 146.05,45.72 148.59,45.72 151.13,45.72 139.7,48.26 142.24,48.26 144.78,48.26 147.32,48.26 149.86,48.26 54.61,50.8 69.85,50.8 151.13,55.88 78.74,58.42 81.28,58.42 83.82,58.42 148.59,60.96 151.13,60.96 99.06,63.5 147.32,63.5 149.86,63.5 148.59,66.04 151.13,66.04 83.82,68.58 99.06,68.58 147.32,68.58 149.86,68.58 80.01,71.12 82.55,71.12 81.28,73.66 74.93,76.2 80.01,76.2 82.55,76.2 151.13,76.2 63.5,78.74 71.12,78.74 73.66,78.74 81.28,78.74 95.25,81.28 97.79,81.28 148.59,81.28 151.13,81.28 88.9,83.82 93.98,83.82 96.52,83.82 99.06,83.82 149.86,83.82 77.47,86.36 90.17,86.36 88.9,88.9 144.78,88.9 147.32,88.9 149.86,88.9 90.17,91.44 97.79,91.44 142.24,99.06 144.78,99.06 77.47,101.6 85.09,101.6 87.63,101.6 90.17,101.6 97.79,101.6 100.33,101.6 140.97,101.6 143.51,101.6 146.05,101.6 148.59,101.6 151.13,101.6 71.12,104.14 83.82,104.14 86.36,104.14 88.9,104.14 99.06,104.14 101.6,104.14 142.24,104.14 144.78,104.14 147.32,104.14 149.86,104.14 69.85,106.68 97.79,106.68 100.33,106.68 102.87,106.68 140.97,106.68 143.51,106.68 146.05,106.68 148.59,106.68 151.13,106.68
  other v3: 58.115,89.179 58.115,92.253 58.09,95.301 58.039,98.425
I/O1_PWM: U1.1 U3.40 | length 46.5
  Bottom Layer w0.254: U1.1@69.421,60.457 69.421,60.856 68.986,61.29 64.135,61.29 63.457,61.968 63.457,70.163 64.033,70.739 75.413,70.739 76.175,71.501 76.175,80.442 75.794,80.823 73.762,80.823 73.411,81.173 U3.40@73.411,87.416
I/O2_Enable: R8.1 U1.3 U3.39 | length 51.2
  Bottom Layer w0.254: U1.3@69.421,59.157 71.109,59.157 R8.1@71.794,59.842 71.794,61.277 71.222,61.849 64.668,61.849 63.965,62.552 63.965,69.502 64.668,70.206 75.598,70.206 76.683,71.291 76.683,81.229 76.429,81.483 74.574,81.483 73.919,82.138 73.919,82.146 ; 73.911,82.146 U3.39@73.911,87.416
"IICI  SCL": R27.2 R29.2 U3.21 U5.5 U6.5 | length 91.1
  POWER w0.254: v1(72.903,97.571) 72.927,97.571 73.317,97.18 123.266,97.18 123.596,96.85 123.596,84.353 123.139,83.896 v1(122.479,83.896) ; v1(122.428,73.78) v1(124.816,73.736)
  Bottom Layer w0.254: v1(72.903,97.571) 72.939,97.571 73.411,97.099 U3.21@73.411,95.616 ; R29.2@118.783,73.78 v1(122.428,73.78) 122.466,73.742 U6.5@122.466,71.621 ; R27.2@118.834,82.721 118.834,82.718 U5.5@122.466,82.718 124.369,82.718 124.841,82.245 124.841,73.762 v1(124.816,73.736) ; U5.5@122.466,82.751 122.479,82.764 v1(122.479,83.896)